# Altium PCB Drude02.PcbDoc (part 2 of 3)
Units mil, origin at the board's own origin, x right, y up, seen from the top; angles counter-clockwise.
Board outline 1961.13 x 2874.02 mil, 4 copper layers (Top Layer, GND, Supply, Bottom Layer), stack 59.85 mil thick; 217 components, 145 nets, 718 pads, 491 vias.
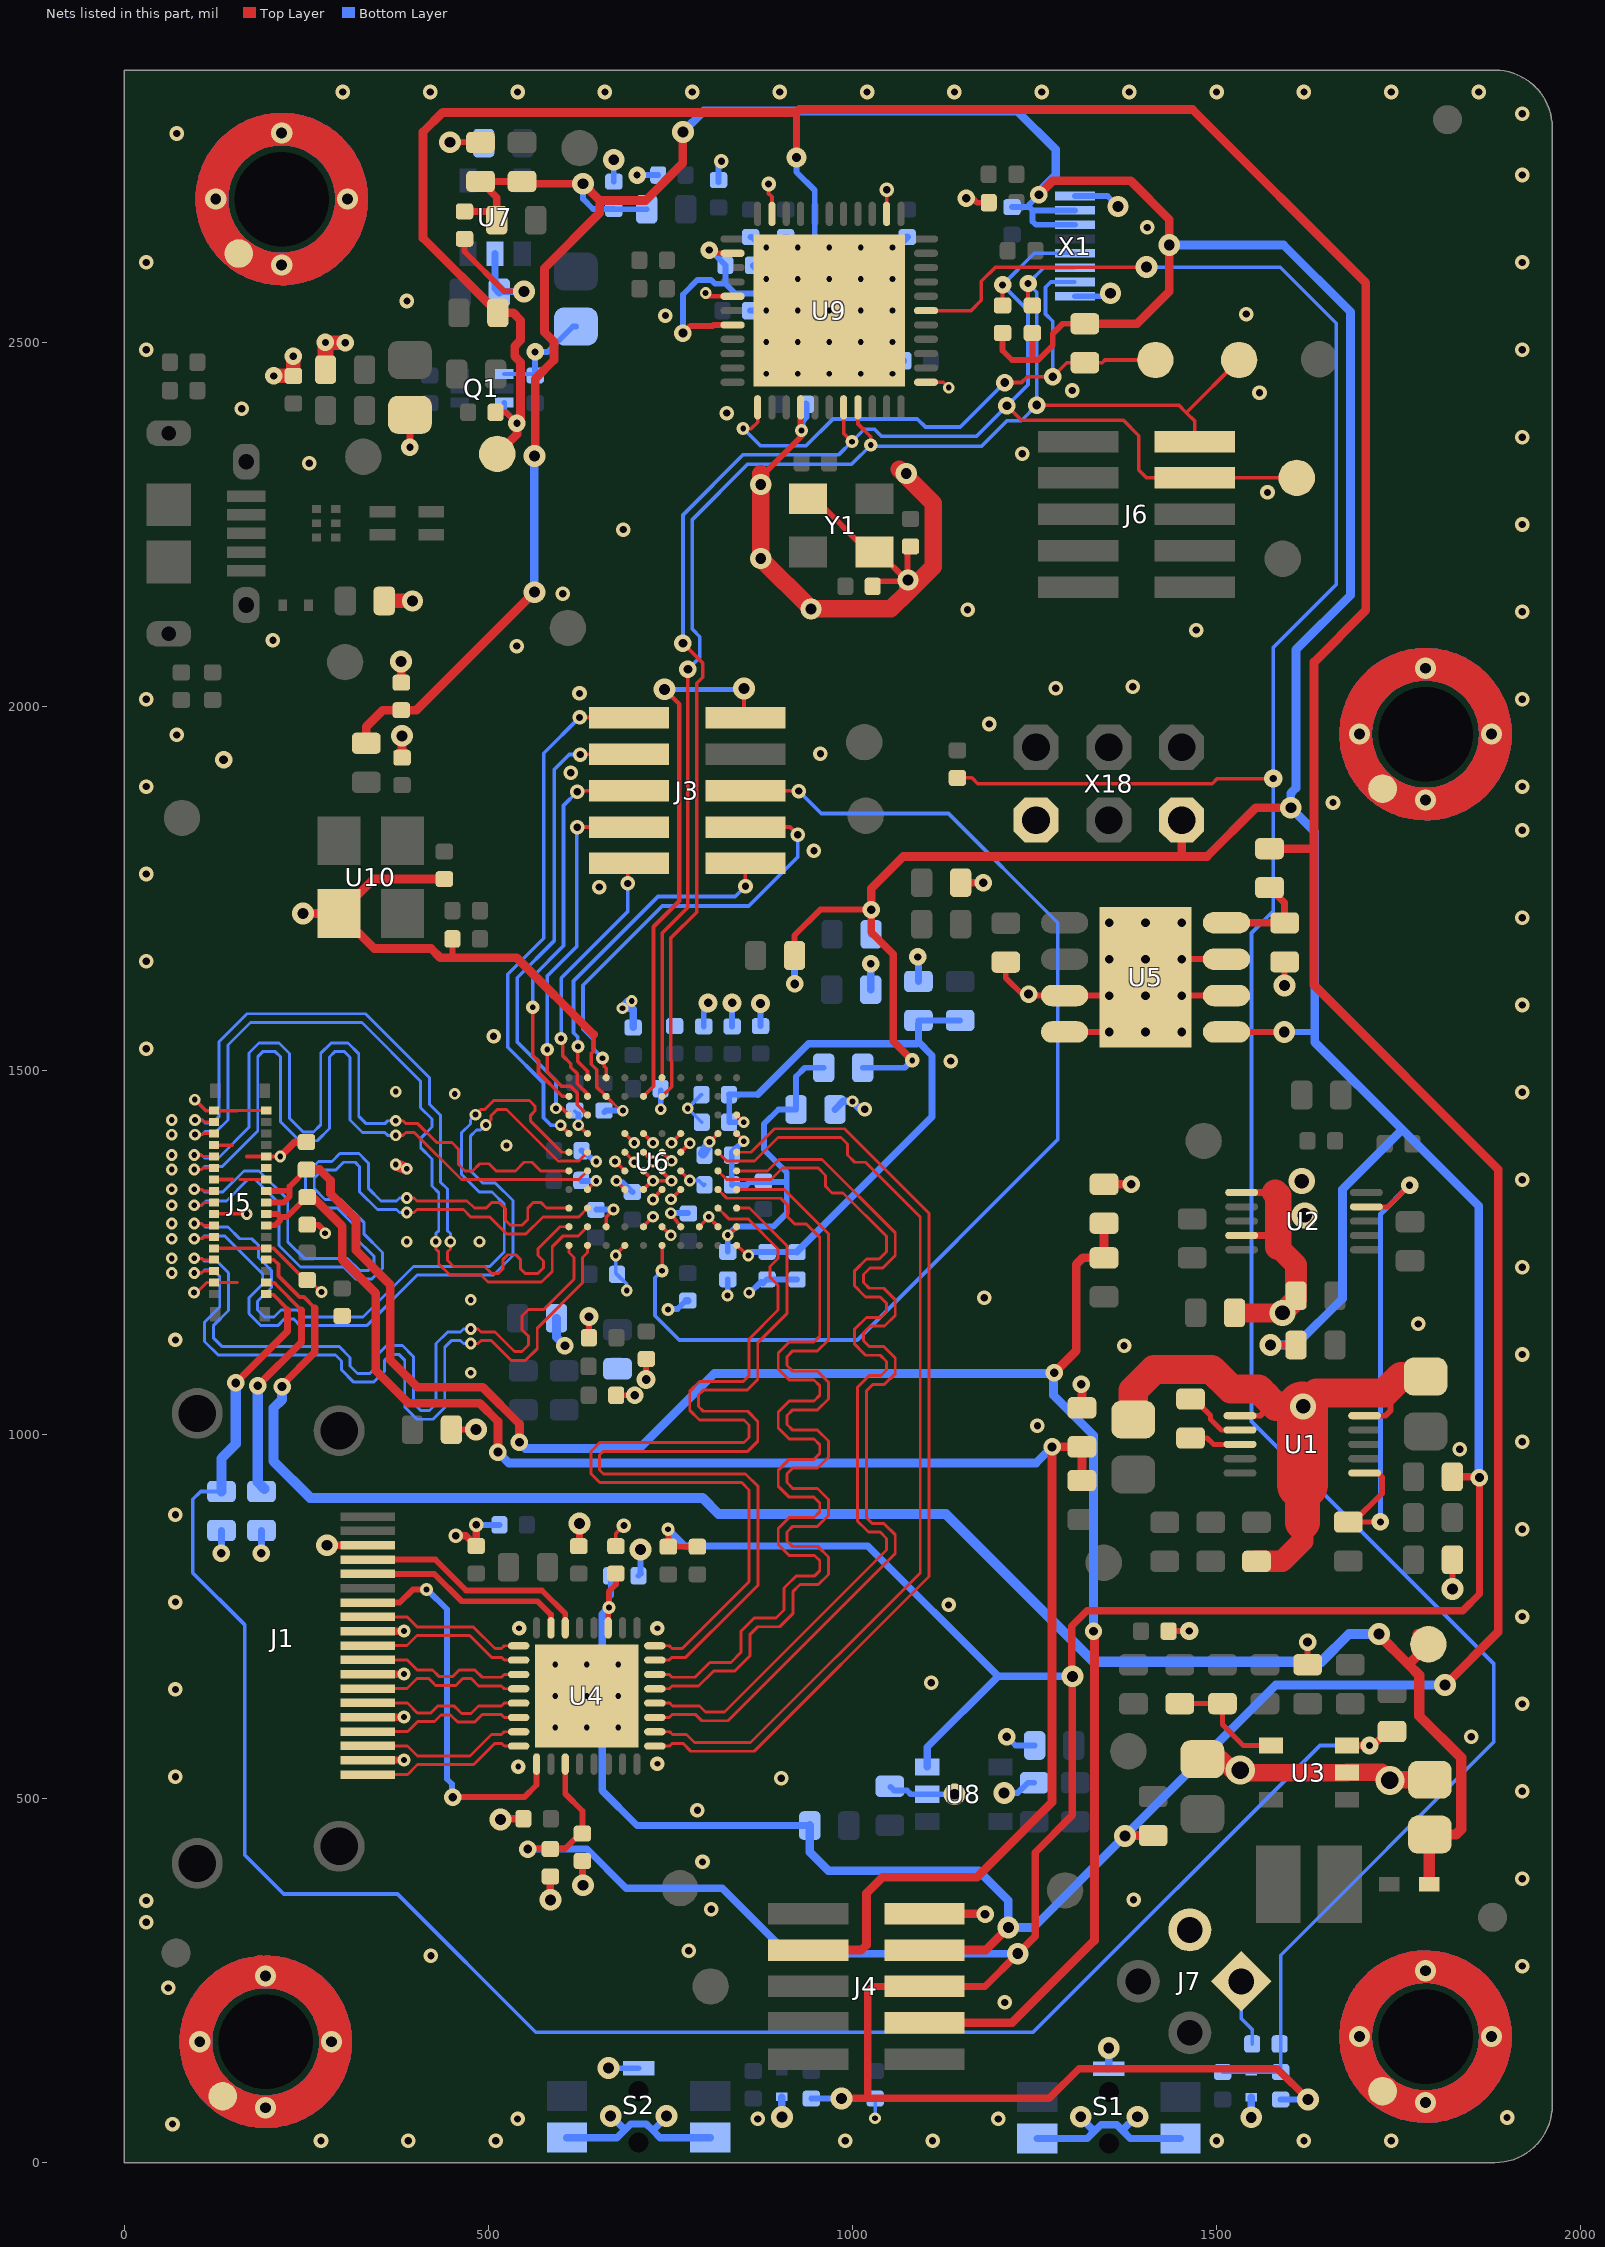
[diagram p4: the nets of this part, all layers, seen from the top]

## Via types
v1: diameter 20, hole 10, Top Layer to Bottom Layer, 120 vias
v2: diameter 16, hole 8, Top Layer to Bottom Layer, tented both sides, 85 vias
v3: diameter 24, hole 12, Top Layer to Bottom Layer, tented both sides, 58 vias
v4: diameter 30, hole 15, Top Layer to Bottom Layer, tented both sides, 34 vias
v5: diameter 19.68, hole 8, Top Layer to Bottom Layer, 34 vias
v6: diameter 18, hole 8, Top Layer to Bottom Layer, tented both sides, 31 vias
v7: diameter 29, hole 15, Top Layer to Bottom Layer, tented both sides, 26 vias
v8: diameter 24, hole 10, Top Layer to Bottom Layer, tented both sides, 20 vias
v9: diameter 30, hole 15, Top Layer to Bottom Layer, 17 vias
v10: diameter 20, hole 10, Top Layer to Bottom Layer, tented both sides, 13 vias
v11: diameter 26, hole 11.81, Top Layer to Bottom Layer, 12 vias
v12: diameter 16, hole 8, Top Layer to Bottom Layer, 9 vias
v13: diameter 25, hole 10, Top Layer to Bottom Layer, 9 vias
v14: diameter 26, hole 12, Top Layer to Bottom Layer, tented both sides, 5 vias
v15: diameter 24, hole 12, Top Layer to Bottom Layer, 5 vias
v16: diameter 20, hole 8, Top Layer to Bottom Layer, tented both sides, 4 vias
v17: diameter 36, hole 20, Top Layer to Bottom Layer, tented both sides, 4 vias
v18: diameter 40, hole 24, Top Layer to Bottom Layer, tented both sides, 2 vias
v19: diameter 27, hole 12, Top Layer to Bottom Layer, tented both sides, 1 vias
v20: diameter 32, hole 15, Top Layer to Bottom Layer, tented both sides, 1 vias
v21: diameter 20, hole 8, Top Layer to Bottom Layer, 1 vias

## Nets (pads, with @x,y where several pads share a name; then routed paths per layer and width w, separated by ;. In a path a pad name is that pad's centre, name@x,y a point inside that pad or via, vN(x,y) a via of type N, cw(c..) or ccw(c..) an arc to the next point about the centre after c; other vN are vias at no path point) (continued)
3.3V: C43.1 C44.2 C61.2 C68.1 C69.2 C78.1 FL2.1 FL3.2 FL7.2 FL13.1 FL16.1 FL17.1 FL18.2 FL19.2 FL24.2 J4.6 R14.2 R16.2 R19.2 R20.2 R22.2 R23.2 R27.2 R28.2 U4.27 U5.5 U8.3 X1.2 X1.3 X18.2 | length 10876.4
  Top Layer w7: R16.2@747,846 R14.2@786.98,846
  Top Layer w8: v3(553.81,430.7) C68.1@585,430.7 604.7,430.7 629,455 629,483 605.47,506.53 U4.27@605.47,547.5 ; v6(746.37,870.03) 747,870.66 R16.2@747,846 ; FL17.1@920.44,1658 920.44,1685.66 955.78,1721 v3(1025.78,1721) ; R27.2@1206.11,2513 1206.11,2489 1219.11,2476 1246.11,2476 ; R28.2@1247.11,2513 1247.11,2477 1246.11,2476 ; R22.2@1319.11,2525.77 1288.89,2525.77 1275.11,2512 1275.11,2496 1255.11,2476 1246.11,2476 ; U5.5@1513.68,1553 v4(1593,1553)
  Top Layer w10: C61.2@467.11,2680 499.34,2680 FL18.2@511.34,2668 511.34,2699 C78.1@489.11,2721.23 FL7.2@546.11,2721.23 549.34,2718 v4(630,2718) ; v4(984.69,88.32) 1021,88.32 ; v3(1025.78,1721) 1025.78,1689.77 1055.78,1659.77 1055.78,1540.22 v21(1082,1514) ; v4(1574,1123) FL2.1@1597.1,1123 ; v4(1625.81,86.6) 1583.41,129 1311,129 1270.32,88.32 1021,88.32 ; FL3.2@1823.88,942 1860.11,942 v3(1861.11,941) 1861.11,781.11 1838,758 1322,758 1301,737 1301,669 v9(1302,668) 1302,477 1251,426 1251,311 v9(1227,287) 1182,242 J4.6@1099.03,242 1028,242 1021,235 1021,88.32
  Top Layer w12: FL24.2@332.3,1949.51 332.3,1972.3 355,1995 C44.2@380.32,1995 401,1995 v9(563,2157) ; v9(563,2344) 564.11,2345.11 564.11,2450.11 590,2476 590,2501 577,2514 577,2602 653,2678 653,2695 ; v4(630,2718) 653,2695 ; v9(767,2789.02) 767,2746.07 715.93,2695 653,2695 ; v3(1025.78,1721) 1025.78,1750.11 1069.67,1794 1452,1794 ; v3(1256.11,2703) 1275.11,2722 1382,2722 1435,2669 v9(1435,2634) 1435,2570 1390.77,2525.77 R22.2@1319.11,2525.77 ; X18.2@1452.11,1844 1452.11,1794.11 1452,1794 ; v9(1602,1861) 1554,1861 1487,1794 1452,1794
  Bottom Layer w8: v4(630,2718) 630,2697 643.7,2683.3 C43.1@672.11,2683.3 672.41,2683 FL19.2@717.34,2683 ; R20.2@943.35,88.02 984.39,88.02 v4(984.69,88.32) ; FL13.1@1013.98,1503.78 1071.69,1503.78 1081.91,1514 v21(1082,1514) ; FL16.1@1025.55,1687 1025.55,1720.77 v3(1025.78,1721) ; R23.2@1219.11,2685.9 1242.98,2685.9 ; v3(1256.11,2703) 1242.98,2689.87 1242.98,2685.9 ; X1.3@1305.43,2661.81 1251.88,2661.81 1247.39,2666.31 1247.39,2681.5 ; X1.2@1305.43,2681.5 1247.39,2681.5 ; R19.2@1588.04,86.6 v4(1625.81,86.6) ; v4(1593,1553) 1635,1553 ; 1242.98,2685.9 1247.39,2681.5
  Bottom Layer w10: v3(553.81,430.7) 635.32,430.7 689.02,377 821,377 911,287 v9(1227,287) ; v6(746.37,870.03) 769.4,847 1021,847 1200,668 ; U8.3@1102.8,543.4 1102.8,570.8 1200,668 ; v9(1302,668) 1200,668
  Bottom Layer w12: v9(563,2157) v9(563,2344) ; v9(767,2789.02) 795.98,2818 1226,2818 1279,2765 1279,2730.06 1256.11,2707.17 v3(1256.11,2703) ; v9(1435,2634) 1592,2634 1684,2542 1684,2153 1609,2078 1609,1888 1602,1881 v9(1602,1861) 1635,1828 1635,1553 1635,1539 1755,1419 ; v4(1574,1123) 1609,1123 ; 1609.1,1123 1609,1123 ; v3@1860.11,941 1860.11,1313.89 1755,1419 ; 1609,1123 1673,1187 1673,1337 1755,1419
5.5OK: R1.1 U1.1 U2.9 | length 708.4
  Top Layer w7: R1.1@1681.11,879.77 R1.1@1686.34,879.77 ; R1.1@1687.11,879 R1.1@1686.34,879.77 ; U2.9@1705.76,1312.81 1735.28,1312.81 v8(1765.11,1342.64) ; v8(1725.11,880) 1724.88,879.77 1687.88,879.77 R1.1@1686.34,879.77
  Top Layer w8: R1.1@1681.11,873 R1.1@1687.11,879 ; R1.1@1687.88,879.77 1727.11,919 1727.11,941.32 1721.2,947.23 U1.1@1703.49,947.23
  Bottom Layer w7: v8(1725.11,880) 1725.11,1302.64 v8(1765.11,1342.64)
5.5V: C73.2 C74.1 FL4.2 J4.3 J5.14 J5.16 | length 2428.9
  Top Layer w8: J5.14@194.8,1287.4 207,1287.4 214.09,1294.49 214.09,1299 ; J5.16@194.8,1303.15 209.94,1303.15 214.09,1299 ; C73.2@251,1326 250,1326 223,1299 214.09,1299
  Top Layer w12: C73.2@251,1326 259,1326 299,1286 299,1240 345,1194 345,1088.07 390.07,1043 488,1043 513,1018 v15(513,976) ; J4.3@939.19,292 1012.11,292 1019.11,299 1019.11,370 1041.11,392 1171,392 1274.11,495.11 v3(1274.11,983) 1274.34,983.23 C74.1@1315.11,983.23 FL4.2@1315.11,936.77
  Bottom Layer w12: v15(513,976) 528,961 1252.11,961 v3(1274.11,983)
5V: C66.1 C67.2 C81.1 C92.1 FL1.1 FL6.1 FL8.1 FL15.1 J4.4 Q1.3 TP8.TP U4.11 U9.2 U9.7 | length 6774.7
  Top Layer w8: C81.1@509.81,2404 524.17,2404 v8@539.11,2389.06 ; U4.11@664.53,734.5 664.53,761.87 v6(665.35,762.68) 665.35,784.35 675,794 C67.2@675,809 ; v3(767.11,2513) 776.11,2522 777.11,2522 777.87,2522.76 807.98,2522.76 809.3,2524.07 U9.7@835.24,2524.07 ; v8(803.11,2627) 807.61,2622.5 U9.2@835.24,2622.5
  Top Layer w10: v19(923.11,2754) 923.11,2816.02
  Top Layer w12: TP8.TP@512.11,2347 539.11,2374 v8(539.11,2389) ; v8(539.11,2389) 544.11,2394 544.11,2472.95 536,2481.06 536,2495 544.11,2503.11 544.11,2530.65 534,2540.76 FL6.1@512.88,2540.76 410.11,2643.53 410.11,2789 437.13,2816.02 923.11,2816.02 927.1,2820.01 1467.1,2820.01 1705.11,2582 1705.11,2132.11 1634,2061 1634,1805 ; J4.4@1099.03,292 1183,292 v9(1214,323) ; v9(1374.38,448.83) 1374.77,449.23 FL15.1@1413,449.23 ; FL1.1@1572.8,1804.77 1633.77,1804.77 1634,1805 ; v9(1814,656) 1887,729 1887,1364 1634,1617 1634,1805
  Bottom Layer w8: Q1.3@521.62,2417.31 521.62,2406.51 v8(539.11,2389) ; v6(665.35,762.68) 665.35,776.05 668.3,779 C66.1@668.3,806 ; v3(767.11,2513) 767.11,2566 787.11,2586 805.69,2586 810.99,2580.7 825.41,2580.7 ; v8(803.11,2627) 804.41,2627 C92.1@825.41,2606 825.41,2580.7 ; v19(923.11,2754) 923.11,2734 948.11,2709 948.11,2621 936.11,2609 913.11,2609 902.11,2598 902.11,2576.22 893.11,2567.22 838.89,2567.22 825.41,2580.7
  Bottom Layer w10: v6(665.35,762.68) 656.11,753.45 656.11,511 704.11,463 FL8.1@941.34,463
  Bottom Layer w12: FL8.1@941.34,463 941.34,426.66 967,401 1173,401 1214,360 v9(1214,323) 1248.54,323 v9(1374.38,448.83) 1581.54,656 v9(1814,656)
-5.5V: C71.2 C76.1 FL5.2 J4.8 J5.18 J5.20 | length 2785.7
  Top Layer w8: J5.18@194.8,1318.9 218.8,1318.9 226.9,1327 226.9,1335 ; J5.20@194.8,1334.65 214.09,1334.65 214.09,1335 226.9,1335 ; C71.2@250,1364 226.9,1340.9 226.9,1335
  Top Layer w12: C71.2@250,1364 268,1364 283,1349 283,1331 318,1296 318,1253 365,1206 365,1102.52 402.52,1065 492,1065 542.5,1014.5 v3(542.5,989.5) ; J4.8@1099.03,192 1219.11,192 1332.23,305.12 1332.23,728.77 v3(1331,730) ; v3(1277.11,1085) 1307.47,1115.36 1307.47,1234 1316.24,1242.77 FL5.2@1345.47,1242.77 C76.1@1345.47,1290.23
  Bottom Layer w12: v3(542.5,989.5) 551,981 707.14,981 810.14,1084 1276.11,1084 1276.11,1054 1331,999.11 v3(1331,730)
A_OSCK: J3.1 U6.G10 | length 723.1
  Top Layer w5: v2(599.09,1424.81) U6.G10@610.51,1413.39 ; v10(625.11,1985) 692.51,1985 J3.1@693.08,1984.43
  Bottom Layer w5: v2(599.09,1424.81) 585.86,1424.81 575.67,1435 575.67,1483 526.67,1532 526.67,1632.33 576.11,1681.77 576.11,1936 v10(625.11,1985)
A_SCK: J3.9 U6.J9 | length 374.1
  Top Layer w5: v6(599.78,1544) 601.78,1542 601.78,1520.81 613.17,1509.42 613.17,1504.61 621.93,1495.85 621.93,1482.03 636.1,1467.86 U6.J9@636.1,1464.57 ; v10(691.11,1757) 691.11,1781.16 690.46,1781.81 J3.9@693.08,1784.43
  Bottom Layer w5: v6(599.78,1544) 599.78,1627 691.11,1718.33 v10(691.11,1757)
A_SD_0: J3.7 U6.H9 | length 506.6
  Top Layer w5: v6@580.67,1522 580.67,1498.08 600.19,1478.56 612.67,1478.56 621.93,1469.3 621.93,1453.15 U6.H9@636.1,1438.98 ; v10(622.11,1834) 622.54,1834.43 J3.7@693.08,1834.43
  Bottom Layer w5: v6(580.67,1529) 580.67,1629.89 621.11,1670.33 621.11,1833 v10(622.11,1834)
A_SD_1: J3.5 U6.J10 | length 541.3
  Top Layer w5: v6(560.78,1587) 560.78,1521 568.67,1513.11 568.67,1497.35 601.45,1464.57 U6.J10@610.51,1464.57 ; v10(622.11,1883) 623.54,1884.43 J3.5@693.08,1884.43
  Bottom Layer w5: v6@560.67,1587 560.67,1628.93 603.11,1671.37 603.11,1864 v10(622.11,1883)
A_SD_2: J3.10 U6.K9 | length 462.3
  Top Layer w5: v6(622.78,1533) 622.78,1512.54 636.1,1499.22 U6.K9@636.1,1490.16 ; v10@852.92,1753 J3.10@852.92,1784.43
  Bottom Layer w5: v6(622.78,1533) 622.78,1546 616.78,1552 616.78,1623 732.78,1739 839,1739 v10(853,1753)
A_SD_3: J3.8 U6.K8 | length 614.2
  Top Layer w5: v6(656.78,1517) 658.79,1506 661.69,1503.1 U6.K8@661.69,1490.16 ; J3.8@852.92,1834.43 914.11,1834.43 v10(924.72,1823.82)
  Bottom Layer w5: v6(656.78,1517) 644.28,1529.5 644.28,1542.5 629.78,1557 629.78,1617 738.78,1726 857.55,1726 924.72,1793.16 v10(924.72,1823.82)
A_WFS: J3.3 U6.H10 | length 641.3
  Top Layer w5: v2(592.67,1448) 601.49,1448 U6.H10@610.51,1438.98 ; v10(626.11,1934) 626.54,1934.43 J3.3@693.08,1934.43
  Bottom Layer w5: v2(592.67,1448) 592.67,1486.08 539.67,1539.08 539.67,1627.61 590.11,1678.06 590.11,1913.13 610.98,1934 v10(626.11,1934)
AVDD12: C30.1 C31.2 C33.2 C86.1 C95.1 FL12.2 U6.A1 U6.H1 | length 913.3
  Top Layer w5: U6.A1@840.83,1259.84 847.04,1254.53 v2(857,1246) ; U6.H1@840.83,1438.98 840.83,1438.84 v2(850.67,1429)
  Bottom Layer w5: C31.2@830.67,1429 C31.2@831.67,1430
  Bottom Layer w8: C31.2@830.67,1429 830.67,1466.71 C30.1@830.38,1467 869.67,1467 ; C31.2@831.67,1430 832.67,1429 v2(850.67,1429) ; v2(857,1246) 861.7,1250.7 C33.2@882.97,1250.7 ; C33.2@882.67,1251 C33.2@882.97,1250.7 ; C95.1@923.39,1250.7 C33.2@882.97,1250.7 ; C86.1@1090.58,1564.13 C86.1@1090.58,1568.86 FL12.2@1147.78,1568.86
  Bottom Layer w10: 869.67,1467 939.67,1537 1088.21,1537 1090.58,1539.37 ; C95.1@923.39,1250.7 1109.25,1436.57 1109.25,1520.7 1090.58,1539.37 ; C86.1@1090.58,1564.13 1090.58,1539.37
AVDD33: C34.1 C35.2 C36.2 C87.1 FL13.2 R5.1 U6.B1 U6.G1 | length 562.6
  Top Layer w5: v2(828.67,1274) 829.39,1274 U6.B1@840.83,1285.43 ; U6.G1@840.83,1413.39 v2@850.67,1403.54
  Bottom Layer w8: C35.2@828.67,1251 v2(828.67,1274) 840.67,1286 891.69,1286 909.78,1304.09 909.78,1347 ; C34.1@834.24,1347.13 C36.2@834.24,1383.8 834.24,1387.8 v2@849.44,1403 ; C34.1@834.37,1343 854.67,1343 858.67,1347 909.78,1347 ; FL13.2@960.44,1503.78 934.45,1503.78 922.44,1491.77 C87.1@922.44,1446.58 898.25,1446.58 878.44,1426.77 878.44,1391.34 909.78,1360 909.78,1347
  other v2: 850.67,1403
BTN_2: C13.1 D13.A R19.1 R24.1 R31.1 U9.28 | length 3866.6
  Top Layer w5: U9.28@1100.98,2543.76 1162.76,2543.76 1177,2558 1177,2584 1196.5,2603.5 v9(1404,2603.5) ; R31.1@1144.11,1902 1164,1902 1172,1894 1494,1894 1501,1901 v13(1578,1901)
  Bottom Layer w5: v9(1404,2603.5) 1587.5,2603.5 1664.5,2526.5 1664.5,2167.5 1578,2081 v13(1578,1901) v13@1578,1899 ; R24.1@1508.31,124.5 R19.1@1588.04,124.5 1588.04,285.04 1881,578 1881,685 1548,1018 1548,1689 1578,1719 v13@1578,1896 ; v13@1576,1897 v13@1578,1899 ; v13@1578,1897 v13@1578,1899
CEC_CON: J1.13 U4.25 | length 538
  Top Layer w8: J1.13@334.25,769.21 378.21,769.21 396,787 v6(415,787) ; v3(451,502) 549.32,502 566.1,518.79 U4.25@566.1,547.5
  Bottom Layer w8: v6(415,787) 416,787 443,760 443,527 450,520 v3@450,503
DAOUT: J3.6 U6.A5 | length 1584.4
  Top Layer w5: v6(738.46,1225) U6.A5@738.46,1259.84 ; J3.6@853.49,1883.86 J3.6@852.92,1884.43 925.57,1884.43 v10(926.11,1883.89)
  Bottom Layer w5: v6(738.46,1225) 728.78,1215.31 728.78,1163.22 762,1130 1006.74,1130 1282,1405.26 1282,1703 1132,1853 957,1853 v10(926.11,1883.89)
DDC_CLK_CON: J1.15 U4.15 | length 292.9
  Top Layer w8: J1.15@334.25,808.58 425.55,808.58 463.13,771 567.46,771 585.79,752.67 U4.15@585.79,734.5
DDC_DAT_CON: J1.16 U4.14 | length 321.6
  Top Layer w8: J1.16@334.25,828.27 427.08,828.27 469.35,786 573.67,786 605.47,754.2 U4.14@605.47,734.5
DSI_CLK_N: J5.17 U6.C9 | length 1036.9
  Top Layer w4: v2(96,1315) 106,1315 109.9,1318.9 J5.17@122.75,1318.9 ; v2(387.67,1305.01) 397.67,1305.01 401.67,1309.01 465.7,1309.01 475.7,1299.01 501.75,1299.01 525.24,1275.52 551.19,1275.52 574.69,1299.02 624.1,1299.02 U6.C9@636.1,1311.02
  Bottom Layer w4: v2(96,1315) 106,1315 112.02,1321.02 140.02,1321.02 169,1350 180.03,1350 201,1329.03 212.31,1317.72 212.31,1259.69 241.87,1230.13 300.87,1230.13 317.42,1213.58 339.81,1213.58 354.52,1228.3 354.52,1250.05 328.76,1275.81 328.76,1291.56 297.29,1323.02 275.64,1323.02 260.73,1337.93 260.73,1352.36 271.56,1363.19 289.97,1363.19 300.78,1374 317,1374 323,1368 323,1333.5 347.48,1309.01 373.67,1309.01 377.67,1305.01 v2(387.67,1305.01)
DSI_CLK_P: J5.19 U6.C10 | length 1036.6
  Top Layer w4: v2(96,1337) 106,1337 108.35,1334.65 J5.19@122.75,1334.65 ; v2(387.67,1325.01) 397.67,1325.01 401.67,1321.01 470.67,1321.01 480.67,1311.01 497.01,1311.01 505,1319 514.67,1319 523.67,1310 523.67,1294.07 530.21,1287.52 546.22,1287.52 554,1295.3 554,1311 562,1319 571.67,1319 579.65,1311.02 U6.C10@610.51,1311.02
  Bottom Layer w4: v2(96,1337) 106,1337 109.98,1333.02 135.05,1333.02 164.03,1362 185,1362 224.31,1322.69 224.31,1264.66 246.84,1242.13 305.84,1242.13 322.39,1225.58 334.83,1225.58 342.52,1233.27 342.52,1245.08 316.76,1270.84 316.76,1286.59 292.32,1311.02 270.67,1311.02 248.73,1332.96 248.73,1357.33 266.59,1375.19 285,1375.19 295.81,1386 321.97,1386 331.49,1376.49 335,1372.97 335,1338.47 352.45,1321.01 373.67,1321.01 377.67,1325.01 v2(387.67,1325.01)
GND: C2.2 C3.2 C4.2 C5.2 C8.2 C9.2 C10.2 C11.2 C13.2 C14.2 C15.2 C16.1 C17.2 C18.2 C19.2 C20.2 C21.2 C22.2 C23.2 C24.1 C25.2 C26.1 C27.1 C28.2 C29.1 C30.2 C31.1 C32.2 C33.1 C34.2 C35.1 C36.1 C37.2 C38.1 C39.2 C40.1 C41.2 C42.1 C43.2 C44.1 C45.2 C46.2 C47.1 C49.2 C50.2 C51.2 C52.2 C53.2 C54.2 C55.2 C56.2 C57.2 C58.2 C59.2 C60.2 C61.1 C62.2 C63.2 C66.2 C67.1 C68.2 C69.1 C70.1 C71.1 C72.2 C73.1 C74.2 C75.1 C76.2 C77.2 C78.2 C79.2 C80.2 C82.2 C83.2 C84.2 C85.2 C86.2 C87.2 C88.2 C89.2 C90.2 C91.2 C92.2 C95.2 D2.C D13.C FL21.1 FL23.1 H1.1 H2.1 H3.1 H4.1 J1.2 J1.5 J1.8 J1.11 J1.17 J4.2 J5.3 J5.9 J5.10 J5.15 J5.21 J5.22 J5.26 J5.27 J5.33 J5.34 J7.1 J7.3 Q1.1 R11.2 R12.2 R15.2 R17.1 R21.1 R36.1 S1.3 S1.4 S1.5 S2.3 S2.4 S2.5 U1.5 U1.6 U2.1 U2.4 U3.2 U4.33 U5.3 U5.4 U5.6 U5.7 U5.9 U6.A7 U6.B2 U6.B3 U6.B4 U6.B5 U6.B6 U6.B8 U6.D4 U6.D5 U6.D6 U6.D7 U6.D9 U6.E4 U6.E5 U6.E6 U6.E7 U6.F4 U6.F5 U6.F6 U6.F7 U6.G2 U6.G4 U6.G6 U6.G7 U6.G9 U6.J8 U7.2 U8.2 U9.5 U9.15 U9.23 U9.35 U9.43 U9.45 U10.2 X1.1 X1.8 X18.6 Y1.2 Y1.4 | length 9560.4
  Top Layer w4: v2(95.47,1195.23) 99.43,1195.23 112.86,1208.66 J5.3@122.75,1208.66 155.34,1208.66 ; 154.88,1444.88 J5.34@194.8,1444.88 ; 158.39,1350.39 J5.22@194.8,1350.39 ; v2@648.9,1349.41 v2@649.13,1349.41 ; U6.J8@661.69,1464.57 681.26,1445 v2(684.67,1445)
  Top Layer w5: v2(96.46,1460.01) 96.99,1460.01 112.12,1444.88 J5.33@122.75,1444.88 154.88,1444.88 ; J5.9@122.75,1255.91 J5.10@194.8,1255.91 204.69,1255.91 248.29,1212.3 249.35,1213.62 250.7,1215.3 v12@267,1199 ; J5.15@122.75,1303.15 167.85,1303.15 v2(168,1303) ; J5.21@122.75,1350.39 148.39,1350.39 ; J5.27@122.75,1397.64 147.64,1397.64 ; 168,1382 v2(214,1382) ; v2(623.54,1425.01) 635.16,1413.39 U6.G9@636.1,1413.39 ; U6.D9@636.1,1336.61 641.99,1342.5 ; 642.06,1342.34 v2@649.13,1349.41 ; 644.28,1549.5 644.28,1526.42 641.28,1523.42 641.28,1508.5 648.78,1501 648.78,1477.48 U6.J8@661.69,1464.57 ; U6.B8@661.69,1285.43 661.69,1298.98 v2(671.76,1309.06) ; v2(673.73,1375) 674.49,1375 U6.E7@687.28,1362.2 ; v2(674.72,1246.06) 674.72,1247.28 U6.A7@687.28,1259.84 ; C67.1@675,846.7 675,864.02 v1(686,875.02) ; v2(675.7,1348.43) 675.47,1348.43 U6.D7@687.28,1336.61 ; U6.F7@687.28,1387.8 700.31,1374.77 v2(700.31,1374.02) ; U6.G7@687.28,1413.39 700.08,1400.59 v2(700.31,1400.59) ; U6.B6@712.87,1285.43 712.87,1286.19 v2(725.9,1299.21) ; U6.D6@712.87,1336.61 v2@725.44,1349.18 ; U6.E6@712.87,1362.2 v2@725.9,1349.18 ; U6.F6@712.87,1387.8 725.67,1375 v2(725.9,1375) ; U6.G6@712.87,1413.39 725.67,1400.59 v2(725.9,1400.59) ; v2(725.9,1322.83) 725.9,1324.05 U6.D5@738.46,1336.61 ; v2@725.9,1349.64 v2@725.9,1349.18 ; U6.B5@738.46,1285.43 750.28,1273.62 v2(750.5,1273.62) ; U6.E5@738.46,1362.2 738.46,1361.45 v2(751.49,1348.43) 726.2,1348.43 v2@725.44,1349.18 ; U6.F5@738.46,1387.8 750.28,1375.98 v2(751.49,1375.98) ; v2(750.5,1304.13) U6.B4@764.06,1285.43 ; v12(750.67,1323.23) U6.D4@764.06,1336.61 ; v2(751.49,1400.59) 751.49,1400.82 U6.G4@764.06,1413.39 ; U6.E4@764.06,1362.2 764.06,1361.61 v2(776.67,1349) ; U6.F4@764.06,1387.8 770.01,1393.56 v2(776.67,1400) ; U6.B3@789.65,1285.43 802.67,1298.46 815.24,1285.89 U6.B2@815.24,1285.43 ; v12@809.35,1407.5 U6.G2@815.24,1413.39 ; v1(884.68,2717.68) 884.68,2704.69 889.37,2700 U9.43@889.37,2676.63 ; U9.35@1046.85,2676.63 v1(1046.85,2709.85) ; U9.23@1100.98,2445.33 1124.78,2445.33 v2(1132.11,2438) ; v2@725.44,1349.18 v2@725.9,1349.18
  Top Layer w6: v2(798.23,2568) 802.79,2563.44 U9.5@835.24,2563.44
  Top Layer w8: C73.1@251,1288.3 266.36,1288.3 276,1278.66 274.9,1277.56 275.59,1276.87 v12(275.59,1276.57) ; v12@267,1199 267.73,1195.57 270.67,1198.51 v12(270.67,1195.87) ; v4(447.11,2775) C78.2@489.34,2775 ; FL23.1@449.01,1006.78 449.23,1007 v4(483,1007) ; 450.4,1655 R17.1@450.4,1680.74 ; C61.1@467.11,2642.3 467.11,2625 521.67,2570.44 548.29,2570.44 v4(548.78,2569.95) ; C78.2@489.11,2774.77 C78.2@489.34,2775 ; C78.2@492.76,2778.42 C78.2@489.34,2775 ; C51.2@638,1133 v14(638,1162) ; C50.2@675.43,1054 700.65,1054 v3(700.79,1054.13) ; v14(716.54,1075.79) 716.54,1103.61 C49.2@716.93,1104 ; v7@873.94,2319.41 878.05,2319.41 930.11,2371.47 v6(930.11,2379) 928.74,2380.37 U9.15@928.74,2410.88 ; U9.45@889.37,2622.5 v5(924.8,2587.06) v5(968.11,2543.76) ; U9.45@928.74,2504.39 v5(968.11,2543.76) ; Y1.2@938.86,2285.62 948.36,2285.62 1021.78,2212.2 1035.56,2212.2 v7@1075.71,2172.05 ; U9.45@968.11,2578.16 v5(968.11,2543.76) ; v5(1011.42,2500.45) v5(968.11,2543.76) ; U9.45@1011.42,2535.45 U9.45@1054.72,2492.14 ; v5(1011.42,2587.06) v5(968.11,2543.76) ; C58.2@1027.78,2165.16 1034.67,2172.05 v7@1075.71,2172.05 ; C57.2@1079.65,2219.98 1075.71,2216.04 v7@1075.71,2172.05 ; v3(1156.11,2698) 1165.11,2698 1171.11,2692 R21.1@1187.21,2692 R21.1@1187.31,2692 ; C3.2@1210.51,1648.87 1210.51,1627.27 1234.78,1603 U5.3@1291.24,1603 v11(1352.46,1603) U5.9@1377.46,1603 ; U5.4@1291.24,1553 v11(1352.46,1553) 1352.46,1578 U5.9@1377.46,1603 ; C77.2@1435,730 1435.17,730.17 v13(1462.62,730.17) 1462.62,731.38 v13@1461.62,732.38 ; U5.6@1513.68,1603 v11(1452.46,1603) 1427.46,1603 U5.9@1402.46,1628 ; U5.7@1513.68,1653 v11(1452.46,1653) 1427.46,1653 U5.9@1402.46,1628 ; U1.6@1532.23,1025.97 1559.93,1025.97 1567.73,1033.77 1567.73,1052.77 ; 1572.88,1332.5 1580.76,1332.5 ; v4(1593.46,1616.67) C2.2@1593.46,1649.23 ; v3(1625,715) 1625,717.54 1625.12,717.67 C72.2@1625.12,683.94 ; U1.5@1703.49,1025.97 1732.08,1025.97 1739.11,1033 1739.11,1048.99 1730.78,1057.31 ; v4@1823.88,786.23 C14.2@1823.88,828 ; U5.9@1377.46,1603 U5.9@1402.46,1628
  Top Layer w10: v2(214,1382) 233.7,1401.7 C71.1@250,1401.7 ; v4(278,847.95) J1.17@334.25,847.95 ; J1.2@334.25,552.68 334.57,553 v6(384,553) ; J1.5@334.25,611.73 v6@384,611.73 ; J1.8@334.25,670.79 v6@384,670.79 ; J1.11@334.25,729.84 v6@384,729.84 ; v8(392.11,2356.29) C63.2@392.11,2400.65 ; v1(455,861.02) 469.05,861.02 C24.1@483.13,846.94 v10(483.13,876.01) ; v4(516.72,471.35) 517.71,472.33 C22.2@547.92,472.33 ; v4(585,361) C68.2@585,393 ; C70.1@625.13,847.24 v4(625.13,877.71) ; C69.1@629,414.3 629,382 v4(630,381) ; C84.2@1148.55,1758 v3(1179.67,1758) ; v4@1351.94,153.55 v4@1351.94,154.47 ; U2.4@1534.5,1273.44 1568.94,1273.44 1584.69,1257.69 ; U2.1@1534.5,1332.5 1560.13,1332.5 1572.88,1332.5
  Top Layer w12: v4(245.3,1715.74) U10.2@294.99,1715.74 ; v4(380,2062) 380.32,2061.68 C44.1@380.32,2032.7 ; C46.2@381.3,1929.74 v4(381.3,1959.74) ; C47.1@439.3,1763.04 342.29,1763.04 U10.2@294.99,1715.74 ; 644.28,1549.5 538.78,1655 450.4,1655 433.8,1655 421.11,1667.69 343.05,1667.69 U10.2@294.99,1715.74 ; J4.2@1099.03,342 1181.11,342 v3(1182.11,341) ; v3(1314.11,1069) 1315.11,1068 C74.2@1315.11,1036.77 ; C76.2@1345.47,1343.77 v3(1382.7,1343.77)
  Top Layer w16: v12(372.67,1371) v2(387.67,1365.01)
  Top Layer w20: v8(205.09,2454.11) C91.2@232,2454.11 ; v8(232,2481.02) C91.2@232,2454.11 ; C91.2@232.11,2454 C91.2@232,2454.11 ; v8@276.34,2499.77 v8(303.25,2499.77) ; FL21.1@367.32,2145 v7(395.55,2145)
  Top Layer w22: C62.2@276.34,2462.65 v8@276.34,2499.77
  Top Layer w24: v7@873.94,2319.41 v7(873.94,2305) v7(873.94,2203.25) v7(943.03,2134.16) 1052.58,2134.16 1075.71,2157.28 ; v7@1064.01,2325.62 1110.65,2278.98 1110.65,2192.22 1075.71,2157.28 ; v7@1075.71,2172.05 1075.71,2157.28 ; C11.2@1473.46,554 1506.46,554 1524.77,535.69 U3.2@1679.17,535.69 1679.65,536.17 1726.83,536.17 v18(1738,525) 1738,519.5 1744.5,526 C9.2@1793,526
  Top Layer w26: C8.2@1529.57,1167.14 v17(1590.6,1167.14)
  Top Layer w30: R15.2@1554.87,825.97 1590.08,825.97 1617.86,853.75 1617.86,879.51 ; 1584.69,1257.69 1609.1,1233.28 C5.2@1609.1,1190.76 1609.1,1185.65 v17(1590.6,1167.14)
  Top Layer w36: 1580.76,1332.5 1584.69,1328.56 1584.69,1257.69
  Top Layer w40: C10.2@1385.57,1020.66 1385.57,1060.61 1414.33,1089.37 1493.13,1089.37 1519.73,1062.77 1557.73,1062.77 1567.73,1052.77 1581.74,1038.76 v17@1616.88,1038.76 ; v17@1617.86,1037.78 v17@1616.88,1038.76 ; C45.2@1787.15,1079.72 1753.18,1079.72 1730.78,1057.31 1637.39,1057.31 v17(1618.84,1038.76) v17@1616.88,1038.76
  Top Layer w48: 1617.86,879.51 1617.86,931.48
  Top Layer w70: 1617.86,931.48 v17@1617.86,1037.78
  Bottom Layer w4: v2(623.54,1425.01) v2@623.54,1429.94 ; 780.3,1454.62 v2(773.68,1447.98) 773.99,1447.98 780.59,1441.38
  Bottom Layer w5: C27.1@618.67,1444.3 C27.1@623.54,1439.43 ; C38.1@647.67,1308.7 C38.1@648.02,1309.06 ; C25.2@658.67,1443 C25.2@658.97,1442.7 ; v2(674.72,1246.06) 674.72,1221.95 C37.2@676.67,1220 689.96,1206.71 v12(689.96,1197.83) ; C26.1@774.24,1304.13 C26.1@774.67,1303.7 ; v2(776.67,1349) 788.89,1349 C34.2@795.78,1342.11 ; 780.3,1454.62 C30.2@792.68,1467 ; 780.59,1441.38 C31.1@792.97,1429 ; C34.2@796.67,1343 C34.2@795.78,1342.11 ; C34.2@796.67,1344 795.78,1343.11 C34.2@795.78,1342.11 ; v12@1031,60 v12(1031,61) C17.2@1031,88 ; J7.1@1534,249 1534,198 1549,183 C13.2@1549,163
  Bottom Layer w6: Q1.1@521.62,2456.68 561.97,2456.68 564,2454.65 R36.1@564.11,2454.54
  Bottom Layer w8: v4(447.11,2775) 486.11,2775 C19.2@492.76,2781.65 ; v10(483.13,876.01) C23.2@515,876 ; R36.1@564,2454.65 v8(564,2487) 581.11,2487 616.11,2522 C82.2@620.11,2522 ; v2@623.54,1429.94 C27.1@623.54,1439.43 ; C29.1@627.37,1349 627.94,1348.43 v2(648.14,1348.43) ; C28.2@627.67,1390 641.22,1380.07 v2(648.14,1375) ; C38.1@648.02,1309.06 v2(671.76,1309.06) ; C25.2@658.97,1442.7 661.27,1445 v2(684.67,1445) ; v4(665,129.94) 665.18,129.76 S2.5@706.11,129.76 ; C43.2@672.11,2720.7 C43.2@672.11,2721 v4(672.11,2751) ; v2@677.78,1346.34 684.33,1346.34 C52.2@697.67,1333 ; v8(704.11,2730) C83.2@733.11,2730 ; C66.2@706,806 709.3,809.3 709,809.6 v4(709,842.02) ; v2(736.67,1447) C42.1@736.67,1473 ; v6@746.78,1172.36 759.62,1172.36 C80.2@771.25,1184 ; v2(750.5,1304.13) C26.1@774.24,1304.13 ; C40.1@795.67,1560.7 795.67,1589.89 798.78,1593 v14(801.78,1593) ; C60.2@816.11,2720 816.11,2745.13 v10(820,2749.02) ; v2(828.26,1190.94) 828.67,1191.35 C35.1@828.67,1213.3 ; C16.1@834.67,1560.7 v14(834.67,1593) ; v2(858,1195) 859.63,1195 874.63,1210 877,1207.63 C33.1@882.61,1213.24 ; C32.2@859.11,2543.76 v5(881.5,2543.76) ; C59.2@860.11,2644.76 861.11,2644.76 v5@872.94,2632.92 ; C92.2@863.11,2606 863.11,2605.45 v5(881.5,2587.06) ; C15.2@873.67,1561 v14(873.67,1592) ; C33.1@882.85,1213.01 C95.2@923.67,1213.01 ; C55.2@908.11,2644.76 910.42,2644.76 v5(924.8,2630.37) ; C20.2@1052.41,515.8 1057.21,511 1075,511 1080,506 U8.2@1102.8,506 v9(1140,506) ; v5(1054.72,2630.37) v5@1060.72,2630.37 ; v4(1208.37,507.87) 1227.07,507.87 1241.05,521.85 C21.2@1249.71,521.85 ; v3(1212,585) 1224,573 C79.2@1250.23,573 ; X1.8@1305.43,2563.39 1350.32,2563.39 v7(1354.6,2567.67) ; X1.1@1305.43,2701.18 1350.31,2701.18 v7(1364.48,2687.01)
  Bottom Layer w10: v3(133,837) 133.25,837.25 R12.2@133.25,868.23 ; v3(188,837) 188.25,837.25 R11.2@188.25,868.23 ; U7.2@509.11,2622.12 509.11,2574.09 C18.2@514.88,2568.32 516.52,2569.95 v4(548.78,2569.95) ; S2.4@607.69,34.28 676.54,34.28 687.51,45.25 ; v4(667.85,63.98) 668.79,63.98 687.51,45.25 ; v12(696.85,1595.47) 690.94,1595.47 684.06,1588.58 v2(684.06,1585.63) 696.25,1585.63 698.22,1583.66 698.67,1584.11 C41.2@698.67,1559 ; v4(744.6,63.98) 744.6,62.76 725.9,44.06 ; C80.2@771.25,1184 C80.2@773.78,1184 ; S2.3@804.54,34.28 735.68,34.28 725.9,44.06 ; v4(903,62.72) D2.C@903,90.28 ; C90.2@920.44,1658 920.44,1619.34 v3(920.78,1619) ; v6(930.11,2379) 930.11,2392 936.11,2398 C54.2@936.11,2415 ; C87.2@975.98,1446.58 987.08,1457.68 v12(1000,1457.68) 1000,1457.32 1010.47,1446.85 v10(1016.73,1446.85) ; C89.2@1024.98,1611 v8(1024.98,1646.8) ; v5(1054.72,2457.14) 1054.72,2459.37 C56.2@1070.11,2474.76 ; v5@1060.72,2630.37 C53.2@1075.11,2644.76 ; v8(1089.78,1656) 1090.58,1655.2 C86.2@1090.58,1622.4 ; S1.4@1253.68,33.28 1322.54,33.28 1332.2,42.94 ; v4(1313.5,62.99) 1313.5,61.64 1332.2,42.94 ; v4(1351.94,157.49) 1351.94,159.05 v4@1353.09,160.2 ; S1.5@1352.11,128.76 v4@1352.11,154.3 ; v4(1391.31,63) 1391.16,63 1390.27,63.89 1370.67,44.29 ; S1.3@1450.54,33.28 1381.68,33.28 1370.67,44.29 ; v4(1547.68,62.29) D13.C@1547.68,89.85 ; 687.51,45.25 695.43,53.17 716.79,53.17 725.9,44.06 ; 1332.2,42.94 1341.43,52.17 1362.79,52.17 1370.67,44.29
  Bottom Layer w12: C85.2@593.46,1159.82 593.46,1133.54 v3(605,1122)
  Bottom Layer w14: C36.1@794.74,1386 801.87,1398.78 v12(803.67,1402)
  Bottom Layer w16: v12(372.67,1371) v2(387.67,1365.01)
  other v1: 270,30 390,30 510,30 990,30 1110,30 1500,30 1620,30 1740,30 66,53.02 540,60 870,60 1200,60 1899,62.02 1209,220.02 60,240 1920,270 421,284.02 775,291.02 30,330 806,348.02 30,360 1386,361.02 1920,390 794,413.02 787,484.02 1920,510 902,528.02 70,530 1850,585.02 1920,630 70,650 1108,659.02 1920,750 1132,766.02 70,770 1920,870 70,890 1834,980.02 1920,990 1254,1012.02 1920,1110 1373,1122.02 70,1130 1777,1152.02 1181,1188.02 1920,1230 1920,1350 1920,1470 1135,1513.02 30,1530 507,1547.02 1920,1590 30,1650 1920,1710 652,1752.02 30,1770 947,1802.02 1920,1830 1660,1868.02 30,1890 1920,1890 613,1909.02 956,1935.02 72,1961.02 1188,1976.02 30,2010 1920,2010 625,2018.02 1279,2025.02 1385,2027.02 539,2083.02 204,2091.02 1472,2105.02 1920,2130 1158,2133.02 602,2155.02 685,2243.02 1920,2250 1570,2294.02 254,2334.02 1233,2347.02 1920,2370 827.36,2403.01 161,2409.02 1559,2431.02 1302,2434.02 30,2490 1920,2490 743,2537.02 1541,2539.02 388,2557.02 30,2610 1920,2610 1405,2658.02 1920,2730 72,2787.02 1920,2814.02 300,2844.02 420,2844.02 540,2844.02 660,2844.02 780,2844.02 900,2844.02 1020,2844.02 1140,2844.02 1260,2844.02 1380,2844.02 1500,2844.02 1620,2844.02 1740,2844.02 1860,2844.02
  other v2: 475.67,1085 475.67,1185 65.06,1222 65.06,1242 387.67,1265.01 487.67,1265.01 65.06,1269 65.06,1290 802.67,1299.21 65.06,1315 65.06,1337 725.9,1348.43 65.06,1364 65.06,1384 524.67,1397 65.06,1412 65.06,1432 453.67,1468 372.67,1471
  other v3: 1241.78,1605 136.11,1926.77
  other v4: 1824,788
  other v5: 591.69,597.69 635,597.69 678.31,597.69 591.69,641 635,641 678.31,641 591.69,684.31 635,684.31 678.31,684.31 881.5,2457.14 924.8,2457.14 968.11,2457.14 1011.42,2457.14 881.5,2500.45 924.8,2500.45 968.11,2500.45 1054.72,2500.45 924.8,2543.76 1011.42,2543.76 1054.72,2543.76 968.11,2587.06 1054.72,2587.06 881.5,2630.37 968.11,2630.37 1011.42,2630.37
  other v6: 384,612 384,671 384,730 746.78,1172
  other v7: 194,75.45 1787.11,82.45 103.45,166 284.55,166 1696.56,173 1877.66,173 194,256.55 1787.11,263.55 1787.11,1871.45 1696.56,1962 1877.66,1962 1787.11,2052.55 1076.11,2173.76 1073.83,2319.82 216,2606.45 125.45,2697 306.55,2697 216,2787.55
  other v8: 276.11,2500
  other v11: 1402.46,1553 1452.46,1553 1402.46,1603 1352.46,1653 1402.46,1653 1352.46,1703 1402.46,1703 1452.46,1703
  other v16: 541,544 732,548 542,734 732,734
  other v17: 1621.11,1301 1617.17,1348.24
  other v18: 1532.62,539.17
HDMI_CK_N: U4.8 U6.C2 | length 1306.2
  Top Layer w4: U4.8@728.5,709.9 748.27,709.9 752.11,706.06 766.06,706.06 858,798 858,924.03 848.01,934.01 652.9,934.01 640.69,946.23 640.69,976.8 652.9,989.01 851.04,989.01 857.84,995.81 857.84,1013.19 851.01,1020.01 789.99,1020.01 776.49,1033.51 776.49,1059.49 790,1073 850.03,1073 857.85,1080.82 857.85,1131.07 897.78,1171 897.78,1205 886.78,1216 886.78,1231 897.78,1242 897.78,1254.92 856.34,1296.35 829.91,1296.35 U6.C2@815.24,1311.02
HDMI_CK_P: U4.7 U6.C1 | length 1306.2
  Top Layer w4: U4.7@728.5,690.21 748.27,690.21 752.11,694.06 771.03,694.06 845.06,768.08 870,793.03 870,929 852.99,946.01 657.88,946.01 652.69,951.2 652.69,971.83 657.88,977.01 856.01,977.01 869.84,990.84 869.84,1018.16 855.99,1032.01 794.96,1032.01 788.49,1038.48 788.49,1054.52 794.97,1061 855,1061 869.85,1075.85 869.85,1126.1 909.78,1166.03 909.78,1259.89 858.65,1311.02 U6.C1@840.83,1311.02
HDMI_CON_CK_N: J1.12 U4.17 | length 226.8
  Top Layer w4: J1.12@334.25,749.53 388.47,749.53 402.16,735.84 479.16,735.84 508.94,706.06 517.89,706.06 521.73,709.9 U4.17@541.5,709.9
HDMI_CON_CK_P: J1.10 U4.18 | length 226.8
  Top Layer w4: J1.10@334.25,710.16 388.16,710.16 401.84,723.84 474.19,723.84 503.97,694.06 517.89,694.06 521.73,690.21 U4.18@541.5,690.21
HDMI_CON_D0_N: J1.9 U4.19 | length 226.4
  Top Layer w4: J1.9@334.25,690.47 388.53,690.47 402.21,676.79 423,676.79 432.3,667.49 450.51,667.49 456.3,673.27 459.82,676.79 481.21,676.79 491.31,666.69 517.89,666.69 521.73,670.53 U4.19@541.5,670.53
HDMI_CON_D0_P: J1.7 U4.20 | length 226.4
  Top Layer w4: J1.7@334.25,651.1 388.1,651.1 401.79,664.79 418.03,664.79 423.82,659 427.33,655.49 455.49,655.49 459,659 464.79,664.79 476.24,664.79 486.34,654.69 517.89,654.69 521.73,650.84 U4.20@541.5,650.84
HDMI_CON_D1_N: J1.6 U4.21 | length 226.8
  Top Layer w4: J1.6@334.25,631.42 388.58,631.42 402.27,617.73 420.73,617.73 425,622 430,627 452.97,627 457.97,622 462.97,617 476,617 486.32,627.32 517.89,627.32 521.73,631.16 U4.21@541.5,631.16
HDMI_CON_D1_P: J1.4 U4.22 | length 226.8
  Top Layer w4: J1.4@334.25,592.05 389.05,592.05 402.73,605.73 425.7,605.73 434.97,615 448,615 458,605 480.97,605 491.29,615.32 517.89,615.32 521.73,611.47 U4.22@541.5,611.47
HDMI_CON_D2_N: J1.3 U4.23 | length 226.6
  Top Layer w4: J1.3@334.25,572.36 388.64,572.36 402.32,558.68 474.71,558.68 503.97,587.94 517.89,587.94 521.73,591.79 U4.23@541.5,591.79
HDMI_CON_D2_P: J1.1 U4.24 | length 226.6
  Top Layer w4: J1.1@334.25,532.99 388.99,532.99 402.68,546.68 479.68,546.68 508.94,575.94 517.89,575.94 521.73,572.1 U4.24@541.5,572.1
HDMI_D0_N: U4.6 U6.D2 | length 1306.5
  Top Layer w4: U4.6@728.5,670.53 748.27,670.53 752.11,666.69 783.69,666.69 804,687 833.03,687 847,700.97 847,730 850.51,733.51 865,748 895,748 906,759 906,789 909.51,792.51 923,806 948.03,806 955,812.97 955,827.03 948,834.03 913,834.03 898,849.03 898,871.03 913,886.03 947.03,886.03 955,894 955,906.06 947.03,914.03 913,914.03 898,929.03 898,951.03 913,966.03 947.03,966.03 955,974 955,986.06 947.03,994.03 913,994.03 898,1009.03 898,1031.03 913,1046.03 947.03,1046.03 955,1054 955,1067.03 947.03,1075 913,1075 898,1090 898,1112 913,1127 947.03,1127 955,1134.97 955,1271 937,1289 921,1289 911,1299 911,1315 901.39,1324.61 827.24,1324.61 U6.D2@815.24,1336.61
HDMI_D0_P: U4.5 U6.D1 | length 1306.4
  Top Layer w4: U4.5@728.5,650.84 748.27,650.84 752.11,654.69 788.66,654.69 808.97,675 838,675 859,696 859,725.03 869.97,736 899.97,736 918,754.03 918,784.03 927.97,794 953,794 967,808 967,832 952.97,846.03 917.97,846.03 910,854 910,866.06 917.97,874.03 952,874.03 967,889.03 967,911.03 952,926.03 917.97,926.03 910,934 910,946.06 917.97,954.03 952,954.03 967,969.03 967,991.03 952,1006.03 917.97,1006.03 910,1014 910,1026.06 917.97,1034.03 952,1034.03 967,1049.03 967,1072 952,1087 917.97,1087 910,1094.97 910,1107.03 917.97,1115 952,1115 967,1130 967,1275.97 906.36,1336.61 U6.D1@840.83,1336.61
HDMI_D1_N: U4.4 U6.E2 | length 1306.1
  Top Layer w4: U4.4@728.5,631.16 749.12,631.16 752.96,627.32 789.69,627.32 798,619 824.03,619 1046.67,841.64 1046.67,857.36 1038.03,866 1022.03,866 1018.51,869.51 1007,881.03 1007,1064.97 1023.03,1081 1039.03,1081 1046.67,1088.64 1046.67,1100.36 1038.03,1109 1018.03,1109 1014.51,1112.51 1003,1124.03 1003,1144.97 1019.03,1161 1039.03,1161 1046.67,1168.64 1046.67,1180.36 1038.03,1189 1018.03,1189 1014.51,1192.51 1003,1204.03 1003,1224.97 1019.03,1241 1036.67,1241 1046.67,1251 1046.67,1272.36 987.03,1332 972,1332 963,1341 963,1356.03 953.03,1366 903.91,1366 888.11,1350.2 827.24,1350.2 U6.E2@815.24,1362.2
HDMI_D1_P: U4.3 U6.E1 | length 1306.5
  Top Layer w4: U4.3@728.5,611.47 748.27,611.47 752.11,615.32 784.71,615.32 793.03,607 829,607 1058.67,836.67 1058.67,862.33 1043,878 1027,878 1019,886 1019,1060 1028,1069 1044,1069 1058.67,1083.67 1058.67,1105.33 1043,1121 1023,1121 1015,1129 1015,1140 1024,1149 1044,1149 1058.67,1163.67 1058.67,1185.33 1043,1201 1023,1201 1015,1209 1015,1220 1024,1229 1041.64,1229 1058.67,1246.03 1058.67,1277.33 958,1378 898.93,1378 883.14,1362.2 U6.E1@840.83,1362.2
HDMI_D2_N: U4.2 U6.F2 | length 1306.2
  Top Layer w4: U4.2@728.5,591.79 749.12,591.79 752.96,587.94 771.97,587.94 782.92,577 860.03,577 1093,809.97 1093,1299.03 1018.03,1374 1003,1374 993,1384 993,1399.03 984.03,1408 897.67,1408 865.46,1375.8 827.24,1375.8 U6.F2@815.24,1387.8
HDMI_D2_P: U4.1 U6.F1 | length 1306.6
  Top Layer w4: U4.1@728.5,572.1 749.12,572.1 752.96,575.94 767,575.94 777.94,565 865,565 1105,805 1105,1304 989,1420 892.7,1420 860.49,1387.8 U6.F1@840.83,1387.8
I2C_SCL: J6.7 R27.1 TP20.TP U6.J5 U9.18 X1.5 | length 2208.7
  Top Layer w5: U6.J5@738.46,1464.57 751.67,1477.77 751.67,1513 750.5,1514.17 750.5,1682.09 785.94,1717.52 785.94,2031.83 794.44,2040.33 794.44,2059.66 v3(767.11,2086.99) ; U9.18@987.8,2410.88 987.8,2375.07 v6(999.11,2363.76) ; R27.1@1198.11,2550.9 1206.11,2558.9 v8(1206.11,2579) ; v3(1212.11,2413) 1232.11,2393 1372.11,2393 1393.11,2372 1393.11,2325 1404.11,2314 J6.7@1470.03,2314 TP20.TP@1610.11,2314
  Bottom Layer w5: v3(767.11,2086.99) 767.11,2263 850.11,2346 981.35,2346 v6(999.11,2363.76) 1016.11,2380.76 1030.35,2380.76 1040.11,2371 1170.11,2371 v3(1212.11,2413) 1241.11,2442 1241.11,2544 v8(1206.11,2579) 1249.55,2622.44 X1.5@1305.43,2622.44
I2C_SDA: J6.9 R28.1 TP17.TP U6.K5 U9.19 X1.6 | length 2025.3
  Top Layer w5: U6.K5@738.46,1490.16 738.46,1688.75 773.94,1724.22 v3(773.94,2051.17) ; U9.19@1007.48,2410.88 1007.48,2388 1025.11,2370.37 v6(1025.11,2359) ; v8(1241.11,2581) 1241.11,2556.9 R28.1@1247.11,2550.9 ; v3(1253.11,2414) 1448.11,2414 1458.56,2403.56 ; J6.9@1470.03,2364 1470.03,2392.08 1458.56,2403.56 ; TP17.TP@1531,2476 1458.56,2403.56
  Bottom Layer w5: v3(773.94,2051.17) 790.11,2067.35 790.11,2096 780.11,2106 780.11,2257 856.11,2333 999.11,2333 v6(1025.11,2359) 1026.61,2357.5 1177.11,2357.5 1212.11,2392.5 1231.61,2392.5 v3(1253.11,2414) 1253.11,2569 v8(1241.11,2581) 1262.87,2602.76 X1.6@1305.43,2602.76
INT: R22.1 TP18.TP U9.12 X1.7 | length 848.1
  Top Layer w5: v6(849.87,2381.76) 860.85,2381.76 869.68,2390.59 U9.12@869.68,2410.88 ; v3(1209.11,2445) 1232,2445 1240,2453 v3(1275.11,2453) 1294.34,2472.23 R22.1@1319.11,2472.23 1343,2472.23 1346.77,2476 TP18.TP@1416,2476
  Bottom Layer w5: v6(849.87,2381.76) 873.62,2358 936.11,2358 973.11,2395 1089.11,2395 1100.11,2384 1148.11,2384 v3(1209.11,2445) ; v3(1275.11,2453) 1275.11,2529 1265.11,2539 1265.11,2576 1272.18,2583.07 X1.7@1305.43,2583.07
IR: J3.2 U6.J6 | length 738.5
  Top Layer w5: U6.J6@712.87,1464.57 726.67,1478.36 726.67,1522
  Top Layer w6: 726.67,1522 726.67,1697.62 761.94,1732.89 761.94,2003.33 v4(741.65,2023.62) ; v4(850.9,2024.61) 850.9,1986.45 J3.2@852.92,1984.43
  Bottom Layer w7: v4(741.65,2023.62) 849.91,2023.62 v4(850.9,2024.61)
LANE0_N: J5.11 U6.F9 | length 1036.9
  Top Layer w4: v2(96,1269) 107,1269 109.65,1271.65 J5.11@122.75,1271.65 ; v2(496.38,1425.28) 503.46,1432.36 503.46,1438.01 512.11,1446.67 524.83,1446.67 595.7,1375.8 624.1,1375.8 U6.F9@636.1,1387.8
  Bottom Layer w4: v2(96,1269) 106,1269 110,1273 137.43,1273 189.96,1220.47 189.96,1207 170.93,1187.97 170.93,1166.07 187.39,1149.61 210.58,1149.61 219.97,1159 232.14,1159 241.53,1149.61 332.69,1149.61 402.08,1219 506.75,1219 533.67,1245.92 533.67,1321.33 509.67,1345.33 492.33,1345.33 475.11,1362.56 475.11,1409.67 483.66,1418.21 489.31,1418.21 490.61,1419.51 v2(496.38,1425.28)
LANE0_P: J5.13 U6.F10 | length 1037
  Top Layer w4: v2(96,1290) 106,1290 108.6,1287.4 J5.13@122.75,1287.4 ; v2(482.24,1439.43) 489.31,1446.5 494.97,1446.5 507.14,1458.67 556.33,1458.67 564,1451 564,1444.67 558,1438.67 558,1430.46 600.67,1387.8 U6.F10@610.51,1387.8
  Bottom Layer w4: v2(96,1290) 106,1290 111,1285 142.4,1285 158.4,1269 175,1269 184,1260 184,1243.4 202,1225.4 202,1202.07 182.93,1183 182.93,1171.04 192.36,1161.61 205.61,1161.61 215,1171 237.11,1171 246.5,1161.61 327.72,1161.61 397.11,1231 501.78,1231 521.67,1250.89 521.67,1316.36 504.69,1333.33 487.36,1333.33 463.11,1357.59 463.11,1414.64 475.17,1426.7 475.17,1432.36 v2(482.24,1439.43)
LANE1_N: J5.23 U6.E9 | length 1037
  Top Layer w4: v2(96,1364) 106,1364 108.14,1366.14 J5.23@122.75,1366.14 ; v2(372.67,1411) 377.43,1411 382.67,1411 386.67,1415 398,1415 462.8,1350.2 624.1,1350.2 U6.E9@636.1,1362.2
  Bottom Layer w4: v2(96,1364) 106,1364 110,1368 134,1368 183.07,1417.07 183.07,1519.07 189.91,1525.91 207.12,1525.91 214.57,1518.46 214.57,1429.46 240.49,1403.54 264.76,1403.54 281.69,1420.46 281.69,1518.69 288.91,1525.91 302.12,1525.91 309.85,1518.18 309.85,1432.18 327.03,1415 357.67,1415 361.67,1411 v2(372.67,1411)
LANE1_P: J5.25 U6.E10 | length 1036.7
  Top Layer w4: v2(96,1384) 106,1384 108.11,1381.89 J5.25@122.75,1381.89 ; v2(372.67,1431) 382.67,1431 386.67,1427 402.97,1427 428.97,1401 450,1401 459,1392 459,1370.97 467.77,1362.2 478.2,1362.2 488,1372 500.87,1372 510.67,1362.2 537.2,1362.2 549,1374 559.87,1374 571.67,1362.2 U6.E10@610.51,1362.2
  Bottom Layer w4: v2(96,1384) 106,1384 110,1380 129.03,1380 171.07,1422.04 171.07,1524.04 184.94,1537.91 212.09,1537.91 226.57,1523.43 226.57,1434.43 245.46,1415.54 259.79,1415.54 269.69,1425.43 269.69,1523.66 283.94,1537.91 307.09,1537.91 321.85,1523.15 321.85,1437.15 332,1427 357.67,1427 361.67,1431 v2(372.67,1431)
LANE2_N: J5.29 U6.B9 | length 1036.9
  Top Layer w4: v2(97,1412) 107,1412 108.39,1413.39 J5.29@122.75,1413.39 ; v2(427.67,1265.01) 427.67,1255.01 431.67,1251.01 431.67,1234.36 447.03,1219 489.75,1219 499.3,1209.46 572.88,1209.46 587.6,1224.17 587.6,1257.96 602.64,1273 623.67,1273 U6.B9@636.1,1285.43
  Bottom Layer w4: v2(97,1412) 107,1412 111,1416 125.88,1416 142.11,1432.23 142.11,1535 173.11,1566 326.11,1566 406.78,1485.33 406.78,1449.03 422.38,1433.43 422.38,1422.38 407,1407 407,1394 422.38,1378.62 422.38,1341.43 431.67,1332.14 431.67,1280.01 427.67,1276.01 v2(427.67,1265.01)
LANE2_P: J5.31 U6.B10 | length 1036.7
  Top Layer w4: v2(97,1432) 107,1432 109.87,1429.13 J5.31@122.75,1429.13 ; v2(447.67,1265.01) 447.67,1255.01 443.67,1251.01 443.67,1239.33 452,1231 494.72,1231 504.27,1221.46 513.78,1221.46 519.72,1227.39 519.72,1240.19 526.53,1247 537.45,1247 543.72,1240.73 543.72,1227.94 550.2,1221.46 567.91,1221.46 575.6,1229.14 575.6,1238.38 567.91,1246.06 567.91,1255.24 598.1,1285.43 U6.B10@610.51,1285.43
  Bottom Layer w4: v2(97,1432) 107,1432 111,1428 120.91,1428 130.11,1437.2 130.11,1539.97 168.14,1578 331.08,1578 418.78,1490.3 418.78,1454 434.38,1438.4 434.38,1346.4 443.67,1337.11 443.67,1280.01 447.67,1276.01 v2(447.67,1265.01)
LANE3_N: J5.5 U6.A9 | length 1037.1
  Top Layer w4: v2(96,1222) 106,1222 108.41,1224.41 J5.5@122.75,1224.41 ; v2(475.67,1125) 485.67,1125 489.67,1129 504.03,1129 531.03,1102 551,1102 566.94,1117.94 566.94,1146.1 629.31,1208.46 629.31,1243.13 636.1,1249.92 U6.A9@636.1,1259.84
  Bottom Layer w4: v2(96,1222) 106,1222 110.06,1226.06 122.05,1226.06 130.91,1217.2 130.91,1175.2 110.05,1154.34 110.05,1127.95 128.75,1109.25 289.75,1109.25 298,1101 298,1089.03 315.03,1072 341.97,1072 357,1087.03 357,1102.03 365.22,1110.25 376.78,1110.25 385,1102.03 385,1038.03 388.51,1034.51 402.03,1021 423.97,1021 440,1037.03 440,1120 449,1129 461.67,1129 465.67,1125 v2(475.67,1125)
LANE3_P: J5.7 U6.A10 | length 1036.6
  Top Layer w4: v2(96,1242.13) 105.98,1242.13 107.94,1240.16 J5.7@122.75,1240.16 ; v2(475.67,1145) 485.67,1145 489.67,1141 509,1141 532.5,1117.5 536,1114 546.03,1114 554.94,1122.91 554.94,1135.06 546,1144 546,1163 555,1172 575.88,1172 617.31,1213.43 617.31,1243.13 610.51,1249.92 U6.A10@610.51,1259.84
  Bottom Layer w4: v2(96,1242.13) 105.98,1242.13 110.04,1238.06 127.02,1238.06 142.91,1222.18 142.91,1170.23 122.05,1149.37 122.05,1132.92 133.72,1121.25 294.75,1121.25 310,1106 310,1094 320,1084 337,1084 345,1092 345,1107 360.25,1122.25 381.75,1122.25 397,1107 397,1043 407,1033 419,1033 428,1042 428,1124.97 444.03,1141 461.67,1141 465.67,1145 v2(475.67,1145)
LCD-ID-DET1: J5.24
LED-A: C9.1 D1.C J5.8 TP9.TP | length 2454.2
  Top Layer w5: J5.8@194.8,1240.16 205.23,1240.16 211.61,1233.77 211.61,1217.94 240.56,1189 246.5,1189 261.5,1174
  Top Layer w10: v15(216.55,1066) 216.55,1067.92 261.5,1112.88 261.5,1174
  Top Layer w14: v9(1723,726) 1723,725 1763.76,684.24 ; TP9.TP@1776,725.94 TP9.TP@1776,726 ; TP9.TP@1791,712 1791,711.47 1763.76,684.24 ; C9.1@1793,450.6 1828.6,450.6 1836,458 1836,556 1778.5,613.5 1778.5,669.5 1763.76,684.24
  Top Layer w16: D1.C@1792.35,382.14 1792.35,449.95 C9.1@1793,450.6
  Bottom Layer w14: v15(216.55,1066) 216.55,1048.24 204.72,1036.42 204.72,963.58 255.31,913 794,913 816,891 1128,891 1331,688 1644,688 1682,726 v9(1723,726)
LED-K1: J5.2 R10.1 R12.1 U3.3 | length 2756.1
  Top Layer w5: J5.2@194.8,1191.91 204.69,1191.91 224.06,1172.55 224.06,1170.85
  Top Layer w10: v15(152.98,1070.87) 224.06,1141.94 224.06,1170.85 ; U3.3@1679.17,573.09 1715.09,573.09 R10.1@1732.17,590.17
  Bottom Layer w5: R12.1@133.25,921.77 104.77,921.77 94,911 94,810 165,739 165,423 219,369 375,369 565,179 1248,179 1642,573 v13(1710,573)
  Bottom Layer w14: R12.1@133.25,921.77 133.25,967.28 152.98,987 v15(152.98,1070.87)
LED-K2: J5.4 R11.1 | length 338.2
  Top Layer w5: J5.4@194.8,1208.66 206,1208.66 207,1207.66 207,1207 243.11,1170.89
  Top Layer w10: v15(183.07,1066.93) 243.11,1126.97 243.11,1170.89
  Bottom Layer w14: v15(183.07,1066.93) 183.07,934.78 R11.1@192.17,925.69
LED-PWM: R13.2 R29.2 U3.4 | length 165.8
  Top Layer w7: R13.2@1449.62,630.39 R29.2@1508.12,630.39 1508.12,601.66 1536.7,573.09 U3.4@1574.83,573.09
NetC1_1: C1.1 U1.7 | length 88.7
  Top Layer w7: C1.1@1464.31,1048.8 1469.43,1048.8 1491.87,1026.36 1491.87,1021 1506.59,1006.28 U1.7@1532.23,1006.28
NetC1_2: C1.2 U1.8 | length 71.5
  Top Layer w7: C1.2@1464.31,995.26 1487,995.26 1495.66,986.6 U1.8@1532.23,986.6
NetC2_1: C2.1 FL1.2 U5.8 | length 136.4
  Top Layer w10: U5.8@1513.68,1703 1593.24,1703 1593.46,1703.23 1593.46,1730.56 FL1.2@1572.8,1751.23